# Altium PCB SD171-5.0PCB3.PcbDoc (part 2 of 5)
Units mm, origin at the board's own origin, x right, y up, seen from the top; angles counter-clockwise.
Board outline 152.27 x 99.6 mm, 6 copper layers (Top Layer, InternalPlane1, Mid-Layer 1, Mid-Layer 2, InternalPlane2, Bottom Layer); 397 components, 337 nets, 1868 pads, 651 vias.
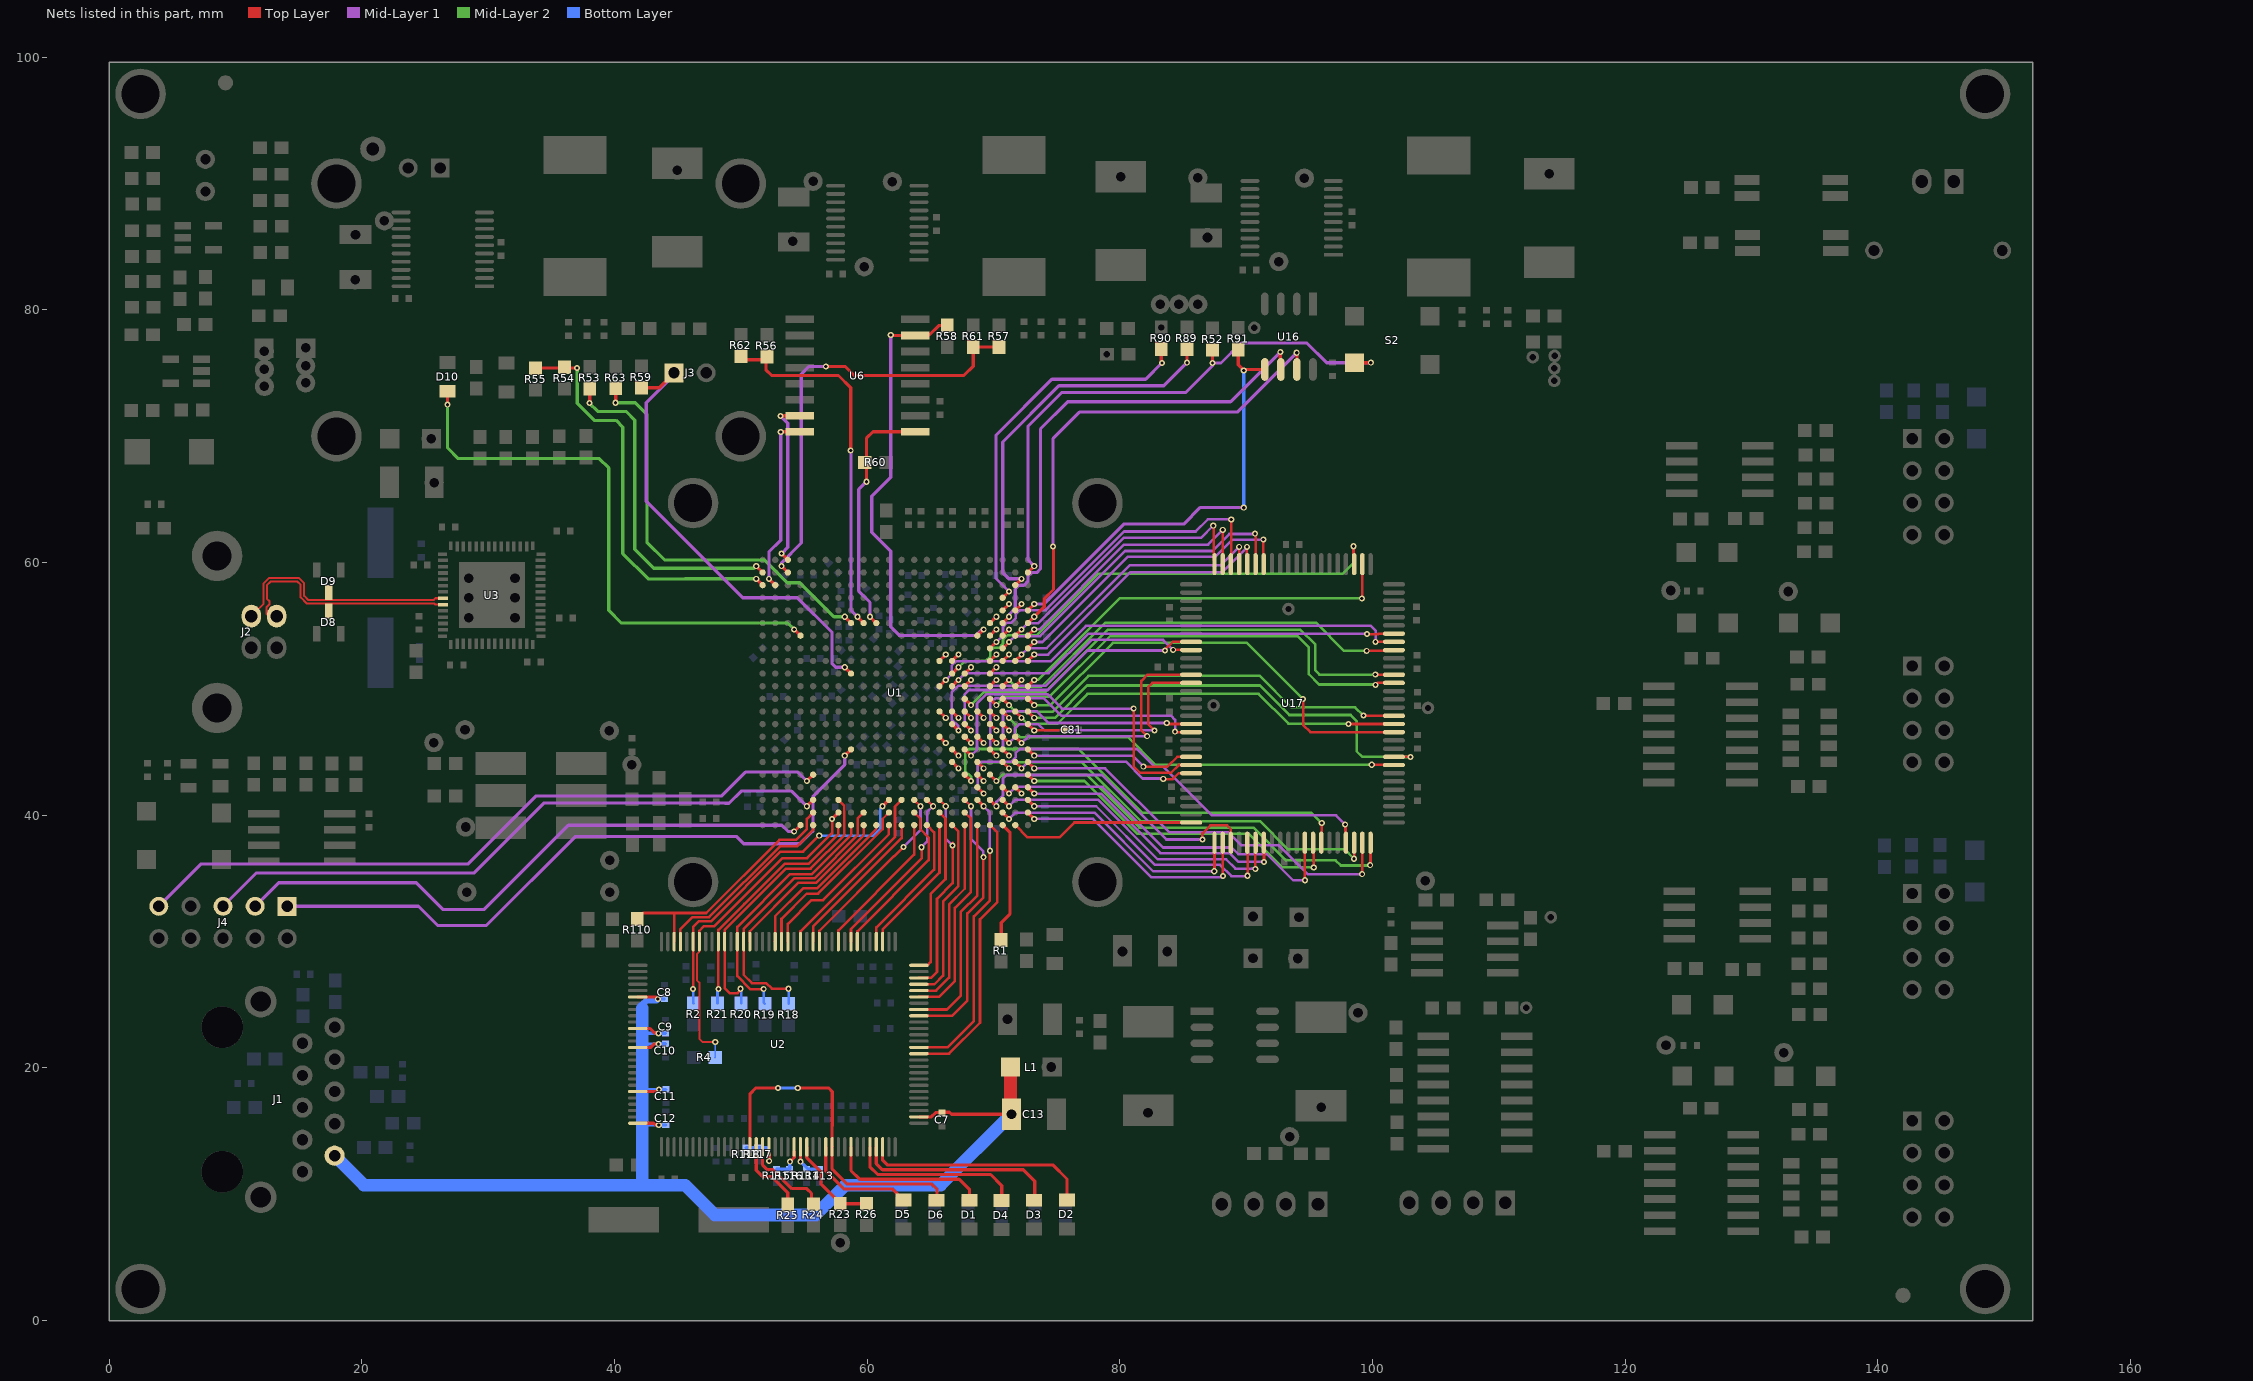
[diagram p6: the nets of this part, all layers, seen from the top]

## Via types
v1: diameter 0.483, hole 0.254, Top Layer to Bottom Layer, 651 vias

## Nets (pads, with @x,y where several pads share a name; then routed paths per layer and width w, separated by ;. In a path a pad name is that pad's centre, name@x,y a point inside that pad or via, vN(x,y) a via of type N, cw(c..) or ccw(c..) an arc to the next point about the centre after c; other vN are vias at no path point) (continued)
A4: U1.N7 U17.33 | length 38.8
  Top Layer w0.203: v1(98.504,61.295) 98.504,59.923 U17.33@98.553,59.874
  Top Layer w0.254: U1.N7@66.733,51.212 v1(67.233,51.712)
  Mid-Layer 2 w0.203: v1(67.233,51.712) 67.703,52.182 68.939,52.182 68.999,52.242 69.428,52.242 69.751,52.566 69.751,52.989 70.005,53.242 70.428,53.242 70.763,53.578 70.763,53.907 71.09,54.233 71.479,54.233 ; v1(98.504,61.295) 98.53,61.32 98.53,59.999 97.641,59.11 78.296,59.11 73.428,54.242 71.488,54.242 71.479,54.233 ; 71.479,54.233 71.555,54.233 ; 71.555,54.233 71.58,54.208 71.58,54.212 71.559,54.233 71.555,54.233
A5: U1.M1 U17.32 | length 32.2
  Top Layer w0.203: v1(99.165,57.154) 99.203,57.193 U17.32@99.203,59.874
  Top Layer w0.254: U1.M1@72.733,50.212 v1(73.233,50.712)
  Mid-Layer 2 w0.203: v1(73.233,50.712) 73.536,50.712 79.996,57.172 99.223,57.172 99.241,57.154 v1(99.165,57.154)
A6: U1.R1 U17.44 | length 24.2
  Top Layer w0.203: v1(91.367,61.828) 91.367,59.91 91.392,59.885 U17.44@91.403,59.874
  Top Layer w0.254: U1.R1@72.733,53.212 v1(73.233,53.712)
  Mid-Layer 1 w0.203: v1(73.233,53.712) 73.878,53.712 80.623,60.456 87.557,60.456 88.903,61.803 91.341,61.803 v1(91.367,61.828)
A7: U1.R3 U17.45 | length 26.2
  Top Layer w0.203: v1(90.706,62.285) 90.753,62.238 U17.45@90.753,59.874 U17.45@90.757,59.878
  Top Layer w0.254: U1.R3@70.733,53.212 v1(71.233,53.712)
  Mid-Layer 1 w0.203: v1(71.233,53.712) 71.703,54.183 73.688,54.183 80.419,60.914 87.328,60.914 88.674,62.26 90.732,62.26 v1(90.706,62.285)
A8: U1.P1 U17.46 | length 22.6
  Top Layer w0.203: v1(90.071,61.244) 90.071,59.905 U17.46@90.103,59.874
  Top Layer w0.254: U1.P1@72.733,52.212 v1(73.233,52.712)
  Mid-Layer 1 w0.203: v1(73.233,52.712) 74.326,52.712 80.864,59.25 88.124,59.25 90.071,61.197 v1(90.071,61.244) v1@90.122,61.193
A9: U1.P2 U17.47 | length 22.8
  Top Layer w0.203: U17.47@89.453,59.874 v1(89.453,61.244)
  Top Layer w0.254: U1.P2@71.733,52.212 v1(72.233,52.712)
  Mid-Layer 1 w0.203: v1(72.233,52.712) 72.738,53.217 74.222,53.217 80.8,59.796 88.005,59.796 v1(89.453,61.244) v1@89.462,61.235
A10: U1.R4 U17.48 | length 27.5
  Top Layer w0.203: U17.48@88.803,59.874 88.827,59.897 v1(88.827,63.403)
  Top Layer w0.254: U1.R4@69.733,53.212 v1(70.233,53.712)
  Mid-Layer 1 w0.203: v1(70.233,53.712) 70.763,54.242 70.763,54.907 71.099,55.242 71.428,55.242 71.763,55.578 71.763,55.907 72.038,56.182 72.053,56.182 72.114,56.242 74.129,56.242 80.347,62.46 86.004,62.46 86.973,63.428 88.827,63.428 88.852,63.403 v1(88.827,63.403)
A11: U1.T1 U17.49 | length 21.7
  Top Layer w0.203: U17.49@88.153,59.874 v1(88.153,62.59)
  Top Layer w0.254: U1.T1@72.733,54.212 v1(73.233,54.712)
  Mid-Layer 1 w0.203: v1(73.233,54.712) 73.634,54.712 80.343,61.422 86.985,61.422 v1@88.102,62.539 ; v1@88.102,62.539 88.141,62.539 88.153,62.551 v1(88.153,62.59) v1@88.102,62.539
A12: U1.T2 U17.50 | length 22.4
  Top Layer w0.203: v1@87.43,62.895 87.43,60.2 87.503,60.126 87.503,60.075 U17.50@87.503,59.874
  Top Layer w0.254: U1.T2@71.733,54.212 v1(72.233,54.712)
  Mid-Layer 1 w0.203: v1(72.233,54.712) 72.703,55.182 73.536,55.182 80.313,61.959 86.444,61.959 v1(87.404,62.92) v1@87.404,62.971
A13: U1.A2 U17.80 | length 14.8
  Top Layer w0.203: U1.A2@71.733,39.212 72.703,38.242 75.223,38.242 76.405,39.424 U17.80@85.653,39.424
A14: U1.B3 U17.81 | length 21.3
  Top Layer w0.203: v1(87.481,35.564) 87.503,35.587 U17.81@87.503,37.824
  Top Layer w0.254: U1.B3@70.733,40.212 v1(71.233,39.712)
  Mid-Layer 1 w0.203: v1(71.233,39.712) 71.703,40.182 78.037,40.182 82.655,35.564 v1(87.481,35.564)
A15: U1.B1 U17.82 | length 20.2
  Top Layer w0.203: v1@88.153,35.197 U17.82@88.153,37.824
  Top Layer w0.254: U1.B1@72.733,40.212 v1(73.233,39.712)
  Mid-Layer 1 w0.203: v1(73.233,39.712) 77.897,39.712 82.528,35.082 88.065,35.082 88.141,35.158 v1(88.166,35.183)
A16: U1.C4 U17.83 | length 25.3
  Top Layer w0.203: v1(86.541,38.079) 86.541,38.562 87.176,39.197 88.497,39.197 88.803,38.89 U17.83@88.803,37.824
  Top Layer w0.254: U1.C4@69.733,41.212 v1(70.233,40.712)
  Mid-Layer 1 w0.203: v1(70.233,40.712) 70.233,41.048 70.763,41.578 70.763,42.907 71.038,43.182 73.991,43.182 73.993,43.184 78.591,43.184 83.696,38.079 v1(86.541,38.079)
A17: U1.F1 U17.99 | length 32.6
  Top Layer w0.203: v1(99.19,35.336) 99.19,37.81 U17.99@99.203,37.824
  Top Layer w0.254: U1.F1@72.733,44.212 v1(73.233,43.712)
  Mid-Layer 1 w0.203: v1(73.233,43.712) 78.85,43.712 83.925,38.638 88.598,38.638 89.602,37.634 92.571,37.634 94.869,35.336 v1(99.19,35.336) v1@99.177,35.323
A18: U1.E4 U17.100 | length 35.4
  Top Layer w0.203: v1(99.825,36.047) 99.85,36.072 U17.100@99.85,37.821 ; U17.100@99.825,37.795 U17.100@99.85,37.821 ; U17.100@99.85,37.821 U17.100@99.853,37.824 99.85,37.826 U17.100@99.85,37.821
  Top Layer w0.254: U1.E4@69.733,43.212 v1(70.233,42.712)
  Mid-Layer 2 w0.203: v1(70.233,42.712) 70.703,43.182 73.305,43.182 73.307,43.184 77.397,43.184 81.562,39.019 90.579,39.019 93.17,36.428 97.091,36.428 97.497,36.022 99.825,36.022 99.85,36.047 v1(99.825,36.047)
ADV: U1.C1 U17.85 | length 22.5
  Top Layer w0.203: U17.85@90.103,37.824 90.122,37.805 v1(90.122,35.209)
  Top Layer w0.254: U1.C1@72.733,41.212 v1(73.233,40.712)
  Mid-Layer 1 w0.203: v1(73.233,40.712) 78.142,40.712 82.782,36.072 87.942,36.072 88.831,35.183 90.122,35.183 v1(90.122,35.209)
B4NC1: U1.J3 | length 0.7
  Top Layer w0.254: U1.J3@70.733,47.212 v1(71.233,46.712)
B4NC2: U1.M2 | length 0.7
  Top Layer w0.254: U1.M2@71.733,50.212 v1(72.233,50.712)
B4NC3: U1.K5 | length 0.7
  Top Layer w0.254: U1.K5@68.733,48.212 v1(69.233,47.712)
B4NC4: U1.H6 | length 0.7
  Top Layer w0.254: U1.H6@67.733,46.212 v1(68.233,45.712)
B4NC5: U1.F3 | length 0.7
  Top Layer w0.254: U1.F3@70.733,44.212 v1(71.233,43.712)
B4NC7: U1.M4 | length 0.7
  Top Layer w0.254: U1.M4@69.733,50.212 v1(70.233,50.712)
B4NC8: U1.J4 | length 0.7
  Top Layer w0.254: U1.J4@69.733,47.212 v1(70.233,46.712)
B4NC9: U1.K4 | length 0.7
  Top Layer w0.254: U1.K4@69.733,48.212 v1(70.233,47.712)
B4NC10: U1.N4 | length 0.7
  Top Layer w0.254: U1.N4@69.733,51.212 v1(70.233,51.712)
B4NC11: U1.N6 | length 0.7
  Top Layer w0.254: U1.N6@67.733,51.212 v1(68.233,51.712)
B4NC12: U1.P3 | length 0.7
  Top Layer w0.254: U1.P3@70.733,52.212 v1(71.233,52.712)
B4NC13: U1.F5 | length 0.7
  Top Layer w0.254: U1.F5@68.733,44.212 v1(69.233,43.712)
B4NC14: U1.K7 | length 0.7
  Top Layer w0.254: U1.K7@66.733,48.212 v1(67.233,47.712)
B4NC15: U1.K8 | length 0.7
  Top Layer w0.254: U1.K8@65.733,48.212 v1(66.233,47.712)
B4NC16: U1.V2 | length 0.7
  Top Layer w0.254: U1.V2@71.733,56.212 v1(72.233,56.712)
B4NC18: U1.P8 | length 0.7
  Top Layer w0.254: U1.P8@65.733,52.212 v1(66.233,52.712)
B4NC19: U1.H8 | length 0.7
  Top Layer w0.254: U1.H8@65.733,46.212 v1(66.233,45.712)
B4NC20: U1.K6 | length 0.7
  Top Layer w0.254: U1.K6@67.733,48.212 v1(68.233,47.712)
B4NC21: U1.P4 | length 0.7
  Top Layer w0.254: U1.P4@69.733,52.212 v1(70.233,52.712)
B4NC22: U1.G7 | length 0.7
  Top Layer w0.254: U1.G7@66.733,45.212 v1(67.233,44.712)
B4NC23: U1.F7 | length 0.7
  Top Layer w0.254: U1.F7@66.733,44.212 v1(67.233,43.712)
B4NC24: U1.H5 | length 0.7
  Top Layer w0.254: U1.H5@68.733,46.212 v1(69.233,45.712)
B4NC25: U1.P7 | length 0.7
  Top Layer w0.254: U1.P7@66.733,52.212 v1(67.233,52.712)
B4NC26: U1.H4 | length 0.7
  Top Layer w0.254: U1.H4@69.733,46.212 v1(70.233,45.712)
B4NC27: U1.M6 | length 0.7
  Top Layer w0.254: U1.M6@67.733,50.212 v1(68.233,50.712)
B4NC29: U1.D2 | length 0.7
  Top Layer w0.254: U1.D2@71.733,42.212 v1(72.233,41.712)
BA#: U1.E1 U17.93 | length 27.6
  Top Layer w0.203: U17.93@95.303,37.824 95.355,37.772 v1(95.355,35.869)
  Top Layer w0.254: U1.E1@72.733,43.212 v1(73.233,42.712)
  Mid-Layer 2 w0.203: v1(73.233,42.712) 77.209,42.712 81.372,38.549 90.211,38.549 92.891,35.869 v1(95.355,35.869)
BB#: U1.E6 U17.94 | length 35.6
  Top Layer w0.203: U17.94@95.953,37.824 95.99,37.86 v1(95.99,39.374)
  Top Layer w0.254: U1.E6@67.733,43.212 v1(68.233,42.712)
  Mid-Layer 2 w0.203: v1(68.233,42.712) 68.233,43.048 67.763,43.518 67.763,44.907 68.099,45.242 76.736,45.242 81.791,40.187 95.177,40.187 v1(95.99,39.374) 95.99,39.4 96.04,39.451 v1@96.04,39.374
CK: C81.1 U1.J1 | length 3.2
  Top Layer w0.203: v1(73.233,46.712) 75.651,46.712 C81.1@75.686,46.747
  Top Layer w0.254: U1.J1@72.733,47.212 v1(73.233,46.712)
CKE#: U1.D1 U17.87 | length 22.7
  Top Layer w0.203: U17.87@91.403,37.824 91.418,37.809 v1(91.418,36.301)
  Top Layer w0.254: U1.D1@72.733,42.212 v1(73.233,41.712)
  Mid-Layer 1 w0.203: v1(73.233,41.712) 78.513,41.712 83.219,37.006 88.395,37.006 88.68,37.006 89.386,36.301 v1(91.418,36.301)
D1_N: D8.3 J2.2 U3.9 | length 18.7
  Top Layer w0.159: J2.2@13.265,55.761 12.652,55.761 12.449,55.964 12.449,56.443 12.703,56.697 12.703,56.926 12.5,57.129 12.5,58.196 12.805,58.501 14.906,58.501 15.16,58.247 15.16,57.238 15.633,56.766 17.403,56.766 25.744,56.766 25.835,56.675 U3.9@26.449,56.675
D1_P: D9.3 J2.3 U3.8 | length 18.7
  Top Layer w0.159: J2.3@11.265,55.761 12.214,56.71 12.214,58.314 12.686,58.786 15.025,58.786 15.446,58.365 15.446,57.356 15.751,57.052 17.404,57.052 25.709,57.052 25.832,57.175 U3.8@26.449,57.175
DA0: U1.J6 U17.58 | length 23.5
  Top Layer w0.203: v1(83.594,53.04) 83.594,53.12 84.198,53.724 U17.58@85.653,53.724
  Top Layer w0.254: U1.J6@67.733,47.212 v1(68.233,46.712)
  Mid-Layer 1 w0.203: v1(68.233,46.712) 67.745,47.2 67.745,49.585 68.072,49.912 74.32,49.912 77.448,53.04 v1(83.594,53.04)
DA1: U1.J7 U17.59 | length 25
  Top Layer w0.203: v1(84.229,53.09) 85.636,53.09 U17.59@85.653,53.074
  Top Layer w0.254: U1.J7@66.733,47.212 v1(67.233,46.712)
  Mid-Layer 1 w0.203: v1(67.233,46.712) 67.233,47.048 66.703,47.578 66.703,49.737 67.208,50.242 74.142,50.242 74.908,51.008 74.908,51.033 77.752,53.878 83.442,53.878 v1(84.229,53.09)
DA2: U1.H2 U17.62 | length 19.6
  Top Layer w0.203: v1(82.172,46.258) 82.147,46.283 81.715,46.715 81.715,50.627 82.212,51.124 U17.62@85.653,51.124 U17.62@85.642,51.135
  Top Layer w0.254: U1.H2@71.733,46.212 v1(72.233,45.712)
  Mid-Layer 1 w0.203: v1(72.233,45.712) 72.763,46.242 82.055,46.242 82.07,46.258 v1(82.172,46.258)
DA3: U1.H3 U17.63 | length 20.8
  Top Layer w0.203: U17.63@85.627,50.5 U17.63@85.653,50.474 82.578,50.474 82.248,50.144 82.248,47.198 82.274,47.198 v1@82.731,46.74 ; v1@82.731,46.74 v1(82.756,46.715) 82.756,46.69 82.731,46.664 v1@82.731,46.74
  Top Layer w0.254: U1.H3@70.733,46.212 v1(71.233,45.712)
  Mid-Layer 1 w0.203: v1(71.233,45.712) 71.703,46.182 71.703,46.867 72.033,47.198 73.587,47.198 74.057,46.728 82.743,46.728 v1(82.756,46.715)
DA4: U1.G3 U17.68 | length 19.6
  Top Layer w0.203: v1(83.721,47.299) 83.721,47.223 U17.68@85.653,47.224
  Top Layer w0.254: U1.G3@70.733,45.212 v1(71.233,44.712)
  Mid-Layer 1 w0.203: v1(71.233,44.712) 70.763,45.182 70.763,47.907 71.099,48.242 73.406,48.242 74.349,47.299 83.62,47.299 v1(83.721,47.299)
DA5: U1.G4 U17.69 | length 22.8
  Top Layer w0.203: v1(84.382,46.613) 84.422,46.574 U17.69@85.653,46.574
  Top Layer w0.254: U1.G4@69.733,45.212 v1(70.233,44.712)
  Mid-Layer 1 w0.203: v1(70.233,44.712) 69.763,45.182 69.763,48.907 70.038,49.182 70.088,49.182 70.158,49.252 73.993,49.252 75.362,47.883 84.052,47.883 84.382,47.553 v1(84.382,46.613)
DA6: U1.G1 U17.72 | length 13.8
  Top Layer w0.203: v1(81.867,43.845) 83.773,43.845 84.552,44.624 U17.72@85.653,44.624
  Top Layer w0.254: U1.G1@72.733,45.212 v1(73.233,44.712)
  Mid-Layer 1 w0.203: v1(73.233,44.712) 81,44.712 v1(81.867,43.845) v1@81.842,43.845
DA7: U1.G6 U17.73 | length 27.8
  Top Layer w0.203: v1(81.105,48.442) 81.105,43.845 81.588,43.362 84.077,43.362 84.688,43.974 U17.73@85.653,43.974
  Top Layer w0.254: U1.G6@67.733,45.212 v1(68.233,44.712)
  Mid-Layer 1 w0.203: v1(68.233,44.712) 68.703,45.182 68.703,48.847 69.438,49.582 74.276,49.582 75.416,48.442 v1(81.105,48.442)
DA8: U1.F2 U17.74 | length 15.1
  Top Layer w0.203: v1@83.455,42.88 v1(83.442,42.88) 83.467,42.854 84.192,42.854 84.661,43.324 U17.74@85.653,43.324 U17.74@85.64,43.337
  Top Layer w0.254: U1.F2@71.733,44.212 v1(72.233,43.712)
  Mid-Layer 1 w0.203: v1(72.233,43.712) 72.763,44.242 80.479,44.242 81.816,42.905 83.417,42.905 v1(83.442,42.88)
DB0: U1.K3 U17.8 | length 33.2
  Top Layer w0.203: v1(99.952,43.997) 101.68,43.997 U17.8@101.703,43.974
  Top Layer w0.254: U1.K3@70.733,48.212 v1(71.233,47.712)
  Mid-Layer 2 w0.203: v1(71.233,47.712) 71.763,47.182 71.763,46.518 72.099,46.182 80.648,46.182 82.832,43.997 v1@99.901,43.997 ; v1@99.901,43.997 99.927,43.972 99.952,43.972 v1(99.952,43.997) v1@99.901,43.997
DB1: U1.K1 U17.9 | length 36.6
  Top Layer w0.203: U17.9@101.703,44.624 102.983,44.624 103,44.607 v1(103.025,44.607)
  Top Layer w0.254: U1.K1@72.733,48.212 v1(73.233,47.712)
  Mid-Layer 2 w0.203: v1(73.233,47.712) 74.863,47.712 77.422,50.271 91.087,50.271 93.424,47.934 98.276,47.934 98.758,47.452 98.758,45.064 99.19,44.632 101.781,44.632 101.806,44.607 v1(103.025,44.607)
DB2: U1.L1 U17.12 | length 35.5
  Top Layer w0.203: v1(94.516,49.204) 94.516,47.147 95.09,46.574 U17.12@101.703,46.574
  Top Layer w0.254: U1.L1@72.733,49.212 v1(73.233,48.712)
  Mid-Layer 2 w0.203: v1(73.233,48.712) 74.517,48.712 79.454,53.649 90.071,53.649 v1(94.516,49.204) ; v1(94.516,49.204) 94.516,49.28 94.542,49.255 94.542,49.23 v1(94.516,49.204)
DB3: U1.K2 U17.13 | length 32.4
  Top Layer w0.203: v1@98.098,47.224 U17.13@101.703,47.224
  Top Layer w0.254: U1.K2@71.733,48.212 v1(72.233,47.712)
  Mid-Layer 2 w0.203: v1(72.233,47.712) 72.703,47.242 74.063,47.242 ; 74.069,47.248 74.063,47.242 ; v1(98.098,47.223) 98.072,47.248 93.348,47.248 90.986,49.611 77.448,49.611 75.079,47.242 74.063,47.242
DB4: U1.L4 U17.18 | length 37.4
  Top Layer w0.203: v1(100.257,50.322) 100.409,50.474 U17.18@101.703,50.474
  Top Layer w0.254: U1.L4@69.733,49.212 v1(70.233,48.712)
  Mid-Layer 2 w0.203: v1(70.233,48.712) 70.903,49.382 74.45,49.382 79.251,54.183 94.085,54.183 94.974,53.294 94.974,51.16 95.786,50.347 100.231,50.347 v1(100.257,50.322)
DB5: U1.L6 U17.19 | length 39.4
  Top Layer w0.203: v1(100.231,51.135) 100.242,51.124 U17.19@101.703,51.124
  Top Layer w0.254: U1.L6@67.733,49.212 v1(68.233,48.712)
  Mid-Layer 2 w0.203: v1(68.233,48.712) 69.258,49.738 74.12,49.738 79.073,54.691 94.288,54.691 95.482,53.497 95.482,51.465 95.812,51.135 v1@100.206,51.135 ; v1@100.206,51.135 100.231,51.16 v1(100.231,51.135) v1@100.206,51.135
DB6: U1.M3 U17.22 | length 34.6
  Top Layer w0.203: v1(99.546,53.014) 101.644,53.014 U17.22@101.703,53.074
  Top Layer w0.254: U1.M3@70.733,50.212 v1(71.233,50.712)
  Mid-Layer 2 w0.203: v1(71.233,50.712) 71.776,50.169 73.79,50.169 78.87,55.249 95.253,55.249 95.532,55.249 97.768,53.014 v1(99.546,53.014) v1@99.444,52.913
DB7: U1.M8 U17.23 | length 39.4
  Top Layer w0.203: v1(100.257,53.725) 101.701,53.725 U17.23@101.703,53.724
  Top Layer w0.254: U1.M8@65.733,50.212 v1(66.233,50.712)
  Mid-Layer 1 w0.203: v1(66.233,50.712) 66.703,51.182 66.703,51.847 67.038,52.182 74.507,52.182 77.321,54.995 99.876,54.995 100.257,54.614 v1(100.257,53.725)
DB8: U1.M7 U17.24 | length 36.8
  Top Layer w0.203: v1(99.571,54.335) 100.46,54.335 100.485,54.36 101.69,54.36 U17.24@101.703,54.374
  Top Layer w0.254: U1.M7@66.733,50.212 v1(67.233,50.712)
  Mid-Layer 1 w0.203: v1(67.233,50.712) 67.763,51.242 74.38,51.242 77.498,54.36 99.546,54.36 v1(99.571,54.335) 99.622,54.284 v1@99.622,54.335
E1#: U1.E5 U17.98 | length 36.5
  Top Layer w0.203: U17.98@98.53,37.847 U17.98@98.553,37.824 ; v1(98.555,36.555) 98.553,36.557 U17.98@98.553,37.824 ; U17.98@98.555,37.822 U17.98@98.553,37.824
  Top Layer w0.254: U1.E5@68.733,43.212 v1(69.233,42.712)
  Mid-Layer 2 w0.203: v1(69.233,42.712) 68.763,43.182 68.763,43.907 69.038,44.182 77.009,44.182 81.664,39.527 91.087,39.527 93.297,37.317 97.793,37.317 v1(98.555,36.555)
E2: U1.D5 U17.97 | length 36.9
  Top Layer w0.203: v1(97.844,39.273) 97.869,39.247 97.869,37.79 U17.97@97.903,37.824
  Top Layer w0.254: U1.D5@68.733,42.212 v1(69.233,41.712)
  Mid-Layer 1 w0.203: v1(69.233,41.712) 68.763,42.182 68.763,43.907 69.099,44.242 71.428,44.242 71.763,44.578 71.763,44.907 72.099,45.242 81.359,45.242 82.756,43.845 83.442,43.845 87.303,39.984 97.133,39.984 v1(97.844,39.273)
E3#: U1.D3 U17.92 | length 30.4
  Top Layer w0.203: U17.92@94.653,37.824 94.653,34.869 v1(94.669,34.853)
  Top Layer w0.254: U1.D3@70.733,42.212 v1(71.233,41.712)
  Mid-Layer 1 w0.203: v1(71.233,41.712) 71.763,42.242 74.016,42.242 74.019,42.245 78.641,42.245 83.438,37.448 88.848,37.448 89.386,36.911 91.672,36.911 93.729,34.853 v1(94.669,34.853)
E-COL: U1.A4 U2.114 | length 22.3
  Top Layer w0.203: U2.114@64.105,21.122 66.485,21.122 68.939,23.576 68.939,31.754 70.31,33.126 70.31,38.635 U1.A4@69.733,39.212
E-CONFIG0: R23.2 R26.2 U2.88 | length 7.7
  Top Layer w0.254: U2.88@55.23,13.747 55.23,12.9 56.349,11.781 56.349,10.816 57.884,9.281 R23.2@57.884,9.254 ; R23.2@57.89,9.26 R23.2@57.884,9.254 ; R26.2@59.966,9.254 R23.2@57.884,9.254
E-CONFIG1: R113.2 R114.2 U2.87 | length 2.9
  Top Layer w0.254: U2.87@54.73,13.747 54.73,12.638 54.74,12.628 v1(54.74,12.577)
  Bottom Layer w0.254: v1(54.74,12.577) 55.333,11.984 R113.2@56.244,11.984
E-CONFIG2: R115.2 R116.2 U2.86 | length 2.6
  Top Layer w0.254: v1(53.902,12.577) 54.23,12.906 U2.86@54.23,13.366
  Bottom Layer w0.254: R115.2@52.841,11.984 R116.2@53.857,11.984 53.876,12.004 53.876,12.552 v1(53.902,12.577)
E-CONFIG3: R117.2 R118.2 U2.82 | length 3.5
  Top Layer w0.254: U2.82@52.23,13.366 52.251,13.346 v1(52.251,12.628)
  Bottom Layer w0.254: R118.2@50.428,13.686 52.057,13.686 52.251,13.492 v1(52.251,12.628)
E-CONFIG4: R24.1 U2.81 | length 7.2
  Top Layer w0.254: U2.81@51.73,13.747 51.73,12.311 52.098,11.942 52.556,11.942 54.054,10.444 55.223,10.444 55.604,10.063 55.604,9.364 R24.1@55.756,9.212
E-CONFIG5: R25.1 U2.80 | length 6.1
  Top Layer w0.254: U2.80@51.23,13.747 51.23,11.896 51.717,11.409 52.429,11.409 53.724,10.114 R25.1@53.724,9.187 R25.1@53.8,9.263
E-CRS: U1.C5 U2.115 | length 23.6
  Top Layer w0.203: U2.115@64.105,21.622 66.35,21.622 68.456,23.728 68.456,31.983 69.726,33.253 v1(69.726,37.19)
  Top Layer w0.254: U1.C5@68.733,41.212 v1(69.233,40.712)
  Mid-Layer 1 w0.203: v1(69.233,40.712) 69.726,40.219 v1(69.726,37.19)
E-GTXCLK: U1.A11 U2.14 | length 12.1
  Top Layer w0.203: U2.14@55.73,29.997 55.73,31.196 62.733,38.199 U1.A11@62.733,39.212
E-INT: R4.2 U1.B16 U2.32 | length 26.8
  Top Layer w0.152: U2.32@46.73,29.997 46.73,29.206 46.535,29.011 46.535,26.954 46.73,26.759 46.73,22.289 46.968,22.052 v1(47.984,22.052)
  Top Layer w0.203: U2.32@46.73,29.997 46.73,30.856 47.069,31.196 47.882,31.196 53.292,36.606 55.248,36.606 57.233,38.591 v1(57.233,39.712)
  Top Layer w0.254: v1(57.233,39.712) U1.B16@57.733,40.212
  Bottom Layer w0.152: R4.2@47.978,20.834 47.984,20.839 v1(47.984,22.052)
E-LED-DULPLEX: D1.2 U2.95 | length 12.7
  Top Layer w0.254: U2.95@58.73,13.747 58.73,11.875 59.424,11.18 67.289,11.18 68.051,10.418 68.102,10.418 D1.2@68.102,9.522
E-LED-LINK10: D2.2 U2.100 | length 17.9
  Top Layer w0.254: U2.100@61.23,13.747 61.23,12.691 61.598,12.323 74.704,12.323 75.823,11.204 D2.2@75.823,9.547
E-LED-LINK100: D3.2 U2.99 | length 16
  Top Layer w0.254: U2.99@60.73,13.747 60.73,12.429 61.217,11.942 72.368,11.942 73.282,11.028 73.282,9.571 D3.2@73.233,9.522
E-LED-LINK1000: D4.2 U2.98 | length 13.8
  Top Layer w0.254: U2.98@60.23,13.747 60.23,12.167 60.836,11.561 69.777,11.561 70.666,10.672 70.666,9.521 D4.2@70.642,9.497
E-LEDL: D5.2 U2.91 | length 9
  Top Layer w0.254: U2.91@56.73,13.747 56.73,11.857 58.169,10.418 61.998,10.418 D5.2@62.869,9.547
E-LEDR: D6.2 U2.79 U2.92 | length 27
  Top Layer w0.254: U2.79@50.73,13.747 50.739,13.757 50.739,17.949 51.209,18.419 v1(52.962,18.419) ; v1(54.511,18.419) 56.95,18.419 57.242,18.127 57.242,15.422 57.23,15.41 U2.92@57.23,13.747 ; U2.92@57.242,13.759 U2.92@57.23,13.747 ; D6.2@65.486,9.522 65.535,9.571 65.535,10.393 65.129,10.799 58.423,10.799 57.23,11.992 U2.92@57.23,13.747
  Bottom Layer w0.254: v1(52.962,18.419) v1(54.511,18.419)
E-MDC: U1.A18 U2.35 | length 15.1
  Top Layer w0.203: U2.35@45.23,29.997 45.23,30.982 46.18,31.932 47.501,31.932 53.112,37.543 54.438,37.543 55.733,38.838 U1.A18@55.733,39.212
E-MDIO: R2.2 U1.C12 U2.33 | length 26.7
  Top Layer w0.203: v1(46.231,26.243) 46.231,26.217 46.23,26.218 U2.33@46.23,29.997 46.23,31.169 46.663,31.602 47.653,31.602 53.165,37.114 54.943,37.114 v1(56.213,38.384)
  Top Layer w0.254: v1(61.233,40.712) U1.C12@61.733,41.212
  Bottom Layer w0.203: v1(46.231,26.243) 46.231,25.154 R2.2@46.274,25.111 ; v1(56.213,38.384) 60.506,38.384 61.039,38.917 61.039,40.518 v1(61.233,40.712)
E-RXCLK: U1.B10 U2.7 | length 13
  Top Layer w0.203: U2.7@59.23,29.997 59.23,30.809 64.875,36.453 64.875,38.231 64.212,38.894 64.212,39.734 U1.B10@63.733,40.212
E-RXD0: U1.A8 U2.3 | length 11.1
  Top Layer w0.203: U2.3@61.23,29.997 61.23,30.955 65.733,35.458 U1.A8@65.733,39.212
E-RXD1: U1.B8 U2.128 | length 13.6
  Top Layer w0.203: U2.128@64.105,28.122 64.773,28.122 65.027,28.376 65.027,33.761 66.212,34.946 66.212,39.734 U1.B8@65.733,40.212
E-RXD2: U1.C8 U2.126 | length 16.4
  Top Layer w0.203: U2.126@64.105,27.122 65.069,27.122 65.535,27.589 65.535,33.38 66.78,34.625 66.78,37.52 v1@66.78,37.571 ; U1.C8@65.733,41.212 v1(66.233,40.712) ; v1(66.754,37.596) v1@66.78,37.571 ; v1@66.78,37.8 v1@66.78,37.571
  Mid-Layer 1 w0.203: v1(66.233,40.712) 66.233,38.118 v1(66.754,37.596)
E-RXD3: U1.A7 U2.125 | length 14.8
  Top Layer w0.203: U2.125@64.105,26.622 65.331,26.622 66.018,27.309 66.018,33.177 67.233,34.392 67.233,38.712 U1.A7@66.733,39.212
E-RXD4: U1.A6 U2.124 | length 15.4
  Top Layer w0.203: U2.124@64.105,26.122 65.466,26.122 66.5,27.157 66.5,32.948 67.733,34.181 U1.A6@67.733,39.212
E-RXD5: U1.B6 U2.123 | length 17.4
  Top Layer w0.203: U2.123@64.105,25.622 65.702,25.622 66.957,26.878 66.957,32.669 68.212,33.923 68.212,39.734 U1.B6@67.733,40.212
E-RXD6: U1.A5 U2.121 | length 17.8
  Top Layer w0.203: U2.121@64.105,24.622 66.328,24.622 67.415,25.709 67.415,32.339 68.733,33.657 U1.A5@68.733,39.212
E-RXD7: U1.C6 U2.120 | length 21.4
  Top Layer w0.203: U2.120@64.105,24.122 66.742,24.122 67.948,25.328 67.948,32.237 69.212,33.501 v1(69.212,36.682) ; U1.C6@67.733,41.212 v1(68.233,40.712)
  Mid-Layer 1 w0.203: v1(68.233,40.712) 68.227,40.707 68.227,38.104 68.244,38.104 69.212,37.136 v1(69.212,36.682)
E-RXDV: U1.A9 U2.4 | length 11.3
  Top Layer w0.203: U2.4@60.73,29.997 60.73,31.115 65.306,35.691 65.306,38.639 64.773,39.172 U1.A9@64.733,39.212
E-RXER: U1.C9 U2.8 | length 14.1
  Top Layer w0.203: U2.8@58.73,29.997 58.73,30.995 64.316,36.58 v1(64.316,37.469) ; U1.C9@64.733,41.212 v1(65.233,40.712)
  Mid-Layer 1 w0.203: v1(64.316,37.469) 64.763,37.917 64.763,40.242 v1(65.233,40.712)
E-TXCLK: U1.A10 U2.10 | length 11.7
  Top Layer w0.203: U2.10@57.73,29.997 57.73,30.884 63.733,36.887 U1.A10@63.733,39.212
E-TXD0: U1.A12 U2.18 | length 13.1
  Top Layer w0.203: U2.18@53.73,29.997 53.73,31.405 55.604,33.278 56.518,33.278 61.733,38.493 U1.A12@61.733,39.212
E-TXD1: U1.B12 U2.19 | length 14.3
  Top Layer w0.203: U2.19@53.23,29.997 53.23,31.794 55.227,33.79 56.121,33.79 61.242,38.912 61.242,39.722 U1.B12@61.733,40.212
E-TXD2: U1.A13 U2.20 | length 13.2
  Top Layer w0.203: U2.20@52.708,30.019 U2.20@52.73,29.997 52.73,32.005 54.938,34.213 56.041,34.213 60.733,38.906 U1.A13@60.733,39.212
E-TXD3: U1.A14 U2.24 | length 13.8
  Top Layer w0.203: U2.24@50.73,29.997 50.73,30.818 54.553,34.64 55.965,34.64 59.733,38.408 U1.A14@59.733,39.212
E-TXD4: R18.1 U1.B14 U2.25 | length 22.9
  Top Layer w0.203: v1(53.775,26.268) 52.458,26.268 52.014,26.712 50.892,26.712 50.23,27.374 U2.25@50.23,29.997 50.23,31.004 54.234,35.008 55.83,35.008 59.254,38.433 59.254,39.734 U1.B14@59.733,40.212
  Bottom Layer w0.203: v1(53.775,26.268) 53.794,26.249 R18.1@53.794,25.078
E-TXD5: R19.1 U1.A15 U2.26 | length 20.4
  Top Layer w0.203: v1(51.819,26.243) 50.752,26.243 49.73,27.265 U2.26@49.73,29.997 49.73,31.164 53.904,35.338 55.631,35.338 58.733,38.44 U1.A15@58.733,39.212 U1.A15@58.734,39.211
  Bottom Layer w0.203: v1(51.819,26.243) 51.819,25.174 R19.1@51.915,25.078
E-TXD6: R20.1 U1.C16 U2.28 | length 22.9
  Top Layer w0.203: v1(49.99,26.268) 49.99,26.141 49.762,25.912 49.127,25.912 48.73,26.309 48.73,26.751 48.73,26.878 U2.28@48.73,29.997 48.73,30.916 53.589,35.775 55.535,35.775 58.212,38.452 58.212,40.734 U1.C16@57.733,41.212
  Bottom Layer w0.203: R20.1@50.035,25.103 v1@50.035,26.223
E-TXD7: R21.1 U1.A16 U2.29 | length 19.2
  Top Layer w0.203: v1@48.23,26.25 U2.29@48.23,29.997 48.23,30.919 50.285,32.974 50.295,32.974 53.47,36.149 55.375,36.149 57.731,38.504 57.731,39.21 U1.A16@57.733,39.212
  Bottom Layer w0.203: R21.1@48.163,25.105 48.163,26.168 v1(48.238,26.243)
E-TXEN: U1.C11 U2.16 | length 14.5
  Top Layer w0.203: U2.16@54.73,29.997 54.73,30.805 62.212,38.286 62.212,40.691 U1.C11@62.733,41.212
E-TXER: U1.C10 U2.13 | length 14.8
  Top Layer w0.203: U2.13@56.23,29.997 56.23,30.857 62.131,36.758 62.157,36.758 v1(62.893,37.495) ; U1.C10@63.733,41.212 v1(64.233,40.712)
  Top Layer w0.254: v1@62.881,37.507 62.893,37.52 v1(62.893,37.495)
  Mid-Layer 1 w0.203: v1(62.893,37.495) 64.233,38.834 v1(64.233,40.712)
  Mid-Layer 1 w0.254: v1@62.881,37.507 62.868,37.495 v1(62.893,37.495)
E_AVDD: C7.2 C8.2 C9.2 C10.2 C11.2 C12.2 C13.1 J1.9 L1.2 pad.2@71.429,16.329 U2.44 U2.49 U2.52 U2.59 U2.64 U2.104 | length 102
  Top Layer w0.254: U2.64@41.855,15.622 43.135,15.622 v1@43.285,15.473 ; U2.59@41.855,18.122 43.343,18.122 ; U2.52@41.855,21.622 42.881,21.622 43.158,21.899 v1(43.488,21.899) ; U2.49@41.855,23.122 42.823,23.122 43.208,22.737 v1(43.488,22.737) ; U2.44@41.855,25.622 43.27,25.622 v1(43.437,25.455) ; U2.104@64.105,16.122 65.092,16.122 65.433,16.464 C7.2@65.958,16.464 ; C7.2@65.943,16.449 C7.2@65.958,16.464 ; C13.1@71.429,16.329 66.685,16.329 66.526,16.489 65.984,16.489 C7.2@65.958,16.464
  Top Layer w1: L1.2@71.353,20.063 71.353,16.405 C13.1@71.429,16.329
  Bottom Layer w0.254: 42.218,15.498 42.234,15.482 C12.2@44.066,15.482 ; 42.218,18.369 42.286,18.3 C11.2@44.072,18.3 ; 42.218,21.899 v1(43.488,21.899) 43.495,21.907 C10.2@44.046,21.907 ; 42.218,22.737 v1(43.488,22.737) 44.033,22.737 C9.2@44.048,22.722 ; v1(43.437,25.455) 43.447,25.466 C8.2@43.972,25.466
  Bottom Layer w0.5: 42.218,24.719 42.218,25.023 42.523,25.328 43.31,25.328 v1(43.437,25.455)
  Bottom Layer w1: J1.9@17.852,13.054 20.182,10.723 42.243,10.723 ; 42.218,24.719 42.218,22.737 42.218,21.899 42.218,18.369 42.218,15.498 42.218,10.749 42.243,10.723 ; pad.2@71.429,16.329 65.823,10.723 58.296,10.723 55.934,8.361 47.958,8.361 45.596,10.723 42.243,10.723
  other v1: 43.513,15.473 43.539,18.292
E_RESET: R110.2 U1.B18 U2.36 | length 20.1
  Top Layer w0.203: R110.2@41.805,31.784 42.284,32.262 44.732,32.262 ; U2.36@44.73,29.997 44.73,32.26 44.732,32.262 ; U1.B18@55.733,40.212 55.233,39.712 55.233,38.923 54.359,38.049 53.059,38.049 47.272,32.262 44.758,32.262 44.732,32.262
EPSCLK: U1.U3 U16.6 | length 40
  Top Layer w0.254: U1.U3@70.733,55.212 v1(71.233,55.712) ; v1(92.713,76.662) 92.713,75.326 U16.6@92.756,75.282
  Mid-Layer 1 w0.254: v1(71.233,55.712) 71.233,55.88 71.728,56.375 71.728,57.908 72.028,58.208 72.429,58.208 72.728,58.507 72.728,58.908 73.028,59.208 73.429,59.208 73.728,59.507 73.728,70.58 75.873,72.725 88.776,72.725 v1(92.713,76.662)
EPSDA: R91.1 U1.V1 U16.5 | length 34.9
  Top Layer w0.254: U1.V1@72.733,56.212 v1(73.233,56.712) ; R91.1@89.387,76.87 89.387,75.644 v1(89.817,75.214) 89.886,75.282 U16.5@91.486,75.282
  Mid-Layer 1 w0.254: v1(73.233,56.712) 73.983,56.712 80.318,63.047 85.068,63.047 86.388,64.368 89.792,64.368 v1(89.817,64.343)
  Bottom Layer w0.254: v1(89.817,64.343) v1(89.817,75.214)
EPWP: U1.U1 U16.7 | length 39
  Top Layer w0.254: U1.U1@72.733,55.212 v1(73.233,55.712) 74.019,56.498 74.019,57.129 74.755,57.866 74.755,61.091 74.73,61.117 v1(74.73,61.269) ; v1(94.008,76.611) 94.008,76.687 94.026,76.669 U16.7@94.026,75.282
  Mid-Layer 1 w0.254: v1(74.73,61.269) 74.73,69.829 76.813,71.912 89.309,71.912 v1(94.008,76.611)
FJDQ1A: U1.T4 | length 0.7
  Top Layer w0.254: U1.T4@69.733,54.212 v1(70.233,54.712)
FJDQ1B: U1.V3 | length 0.7
  Top Layer w0.254: U1.V3@70.733,56.212 v1(71.233,56.712)
FJDQ2A: U1.U4 | length 0.7
  Top Layer w0.254: U1.U4@69.733,55.212 v1(70.233,55.712)
FJDQ2B: U1.T3 | length 0.7
  Top Layer w0.254: U1.T3@70.733,54.212 v1(71.233,54.712)
FPGA_AWAKE: D10.1 U1.T19 | length 45.2
  Top Layer w0.254: v1(26.8,72.496) 26.825,72.521 26.825,72.547 26.801,72.571 D10.1@26.801,73.555 ; v1(54.233,54.712) U1.T19@54.733,54.212
  Mid-Layer 2 w0.254: v1(26.8,72.496) 26.8,69.067 27.638,68.229 38.814,68.229 39.551,67.492 39.551,56.215 40.548,55.217 53.728,55.217 v1(54.233,54.712)
FPGA_CCLK: U1.Y21 U6.16 | length 14.2
  Top Layer w0.254: v1(52.233,58.712) U1.Y21@52.733,58.212 ; v1(53.165,70.337) 53.183,70.355 U6.16@54.659,70.355
  Mid-Layer 1 w0.254: v1(52.233,58.712) 52.233,60.837 53.165,61.77 v1(53.165,70.337)
FPGA_DONE: R54.1 R55.1 U1.Y22 | length 33.8
  Top Layer w0.254: R55.1@33.76,75.379 33.772,75.392 v1(37.036,75.392) ; v1(51.233,58.712) U1.Y22@51.733,58.212
  Mid-Layer 2 w0.254: v1(37.036,75.392) 37.062,75.366 37.062,72.598 38.408,71.251 40.135,71.251 40.668,70.718 40.668,60.71 42.675,58.704 45.596,58.704 ; 46.002,58.704 45.596,58.704 ; 46.155,58.712 46.942,58.712 ; v1(51.233,58.712) 46.942,58.712 ; 45.596,58.704 45.604,58.712 46.942,58.712
FPGA_HSWAPEN: R1.2 U1.A3 | length 9.6
  Top Layer w0.254: R1.2@70.591,30.134 70.615,30.158 70.615,31.5 71.326,32.212 71.326,38.619 U1.A3@70.733,39.212
FPGA_M0: R53.1 U1.AA22 | length 26.6
  Top Layer w0.254: v1(38.027,72.623) 38.046,72.642 R53.1@38.046,73.77 ; v1(51.233,59.712) U1.AA22@51.733,59.212
  Mid-Layer 2 w0.254: v1(38.027,72.623) 38.687,71.963 40.922,71.963 41.608,71.277 41.608,61.041 43.107,59.542 51.063,59.542 v1(51.233,59.712)
FPGA_M1: R63.1 U1.U15 | length 33
  Top Layer w0.254: v1(40.084,72.648) 40.104,72.668 R63.1@40.104,73.795 ; v1(58.233,55.712) U1.U15@58.733,55.212
  Mid-Layer 2 w0.254: v1(40.084,72.648) 41.659,72.648 42.573,71.734 42.573,61.599 43.965,60.208 46.51,60.208 51.865,60.208 53.673,58.399 54.689,58.399 57.376,55.712 v1(58.233,55.712)
FPGA_MISO0: U1.AB20 U6.15 | length 13.6
  Top Layer w0.203: v1(53.14,71.607) 53.114,71.607 53.132,71.625 v1@53.14,71.625
  Top Layer w0.254: v1@53.14,71.625 U6.15@54.659,71.625 ; v1(53.233,60.712) U1.AB20@53.733,60.212
  Mid-Layer 1 w0.254: v1(53.14,71.607) 53.724,71.023 53.724,68.534 53.724,68.356 53.724,61.203 v1(53.233,60.712)
FPGA_MISO1: R57.1 R61.1 U1.AA20 | length 34.6
  Top Layer w0.254: v1(53.233,59.712) U1.AA20@53.733,59.212 ; v1(56.738,75.519) 56.763,75.544 56.797,75.544 56.823,75.519 58.271,75.519 58.982,74.807 67.669,74.807 68.407,75.545 R61.1@68.407,77.073 68.408,77.072 R57.1@70.457,77.072
  Mid-Layer 1 w0.254: v1(53.233,59.712) 53.233,59.991 54.791,61.549 54.791,74.909 55.4,75.519 v1(56.738,75.519)
FPGA_MISO2: R56.2 R62.1 U1.U14 | length 29.6
  Top Layer w0.254: R62.1@50.01,76.335 50.01,76.236 50.193,76.052 R56.2@51.997,76.052 ; R56.2@52.056,76.335 R56.2@52.073,76.319 51.997,76.243 R56.2@51.997,76.052 ; v1(58.702,68.864) 58.702,73.842 57.737,74.807 52.454,74.807 51.997,75.265 R56.2@51.997,76.052 ; v1(59.233,55.712) U1.U14@59.733,55.212
  Mid-Layer 1 w0.254: v1(58.702,68.864) 58.728,68.838 58.728,56.217 v1(59.233,55.712)
FPGA_MISO3: R60.1 U1.U13 U6.1 | length 19.5
  Top Layer w0.254: v1(59.947,66.4) 59.947,69.829 60.473,70.355 U6.1@63.809,70.355 ; v1(60.233,55.712) U1.U13@60.733,55.212
  Mid-Layer 1 w0.254: v1(59.947,66.4) 59.337,65.79 59.337,57.742 60.233,56.846 v1(60.233,55.712)
FPGA_ONCHIP_TERM1: R90.1 U1.W3 | length 30.1
  Top Layer w0.254: U1.W3@70.733,57.212 v1(71.233,57.712) ; R90.1@83.284,76.894 83.284,75.829 83.315,75.798 v1(83.34,75.798)
  Mid-Layer 1 w0.254: v1(71.233,57.712) 70.209,58.737 70.209,70.083 74.628,74.503 82.045,74.503 v1(83.34,75.798)
FPGA_ONCHIP_TERM2: R89.1 U1.Y2 | length 31
  Top Layer w0.254: U1.Y2@71.733,58.212 v1(72.233,58.712) ; R89.1@85.316,76.894 85.316,75.829 v1(85.322,75.823)
  Mid-Layer 1 w0.254: v1(72.233,58.712) 71.216,58.712 70.738,59.191 70.738,69.545 75.187,73.995 83.493,73.995 v1(85.322,75.823)
FPGA_PROG_B: R52.1 S2.1 U1.AA1 | length 45
  Top Layer w0.254: U1.AA1@72.733,59.212 v1(73.233,59.712) ; R52.1@87.348,76.843 87.348,75.804 v1(87.354,75.798) ; S2.1@98.574,75.815 98.583,75.823 v1(99.876,75.823)
  Mid-Layer 1 w0.254: v1(73.233,59.712) 72.738,60.208 72.738,70.783 75.416,73.461 85.22,73.461 87.354,75.595 v1(87.354,75.798) 88.014,75.798 89.589,77.373 94.821,77.373 96.371,75.823 v1(99.876,75.823)
FPGA_SPI_CS: R58.1 U1.T5 U6.7 | length 37.7
  Top Layer w0.254: v1(61.877,78.008) 61.91,77.975 U6.7@63.809,77.975 64.893,77.975 65.675,78.757 R58.1@66.348,78.757 ; U1.T5@68.733,54.212 v1(69.233,54.712)
  Mid-Layer 1 w0.254: v1(61.877,78.008) 61.877,66.756 60.379,65.257 60.379,62.387 61.877,60.888 61.877,54.919 62.58,54.217 68.617,54.217 69.113,54.712 v1(69.233,54.712)
FPGA_SUSPEND: J3.1 R59.2 U1.N15 | length 37.5
  Top Layer w0.254: R59.2@42.142,73.83 43.536,73.83 J3.1@44.724,75.017 ; v1(58.233,51.712) U1.N15@58.733,51.212
  Mid-Layer 1 w0.254: J3.1@44.724,75.017 44.724,74.849 42.523,72.648 42.523,64.851 50.156,57.217 54.474,57.217 57.229,54.462 57.229,51.998 57.515,51.712 v1(58.233,51.712)
FPGA_TCK: J4.1 U1.G15 | length 53.5
  Top Layer w0.254: v1(58.233,44.712) U1.G15@58.733,45.212
  Mid-Layer 1 w0.254: J4.1@14.101,32.788 24.496,32.788 26.013,31.272 29.873,31.272 36.909,38.308 49.685,38.308 50.244,37.749 54.689,37.749 55.654,38.714 55.731,38.714 55.731,41.509 58.233,44.012 v1(58.233,44.712)
FPGA_TDI: J4.9 U1.E18 | length 56.7
  Top Layer w0.254: v1(55.233,42.712) U1.E18@55.733,43.212
  Mid-Layer 1 w0.254: J4.9@3.941,32.788 7.302,36.149 28.426,36.149 33.81,41.533 48.492,41.533 50.371,43.413 54.532,43.413 v1(55.233,42.712)
FPGA_TDO: J4.3 U1.A19 | length 48
  Top Layer w0.254: v1(54.233,38.712) U1.A19@54.733,39.212
  Mid-Layer 1 w0.254: J4.3@11.561,32.788 13.423,34.65 24.311,34.65 26.419,32.542 29.696,32.542 36.361,39.207 53.256,39.207 53.751,38.712 v1(54.233,38.712)
FPGA_TMS: J4.5 U1.C18 | length 51.2
  Top Layer w0.254: v1(55.233,40.712) U1.C18@55.733,41.212
  Mid-Layer 1 w0.254: J4.5@9.021,32.788 11.67,35.437 28.908,35.437 34.445,40.975 48.72,40.975 48.746,40.949 49.076,40.949 50.041,41.914 54.031,41.914 v1(55.233,40.712)
FT#: U1.L3 U17.14 | length 33.9
  Top Layer w0.203: v1(99.292,47.883) 99.301,47.874 U17.14@101.703,47.874 U17.14@101.688,47.858
  Top Layer w0.254: U1.L3@70.733,49.212 v1(71.233,48.712)
  Mid-Layer 2 w0.203: v1(71.233,48.712) 71.763,48.182 74.673,48.182 77.524,51.033 91.087,51.033 93.577,48.544 98.631,48.544 v1(99.292,47.883)
G#: U1.C3 U17.86 | length 24.9
  Top Layer w0.203: v1(90.732,35.742) 90.732,37.802 U17.86@90.753,37.824
  Top Layer w0.254: U1.C3@70.733,41.212 v1(71.233,40.712)
  Mid-Layer 1 w0.203: v1(71.233,40.712) 71.763,41.242 73.903,41.242 73.917,41.229 78.286,41.229 83,36.514 88.42,36.514 89.167,35.768 90.503,35.768 90.478,35.793 90.732,35.793 90.757,35.768 v1(90.732,35.742)